# EAGLE board PCB_2.1 (EAGLE 8.6.3)
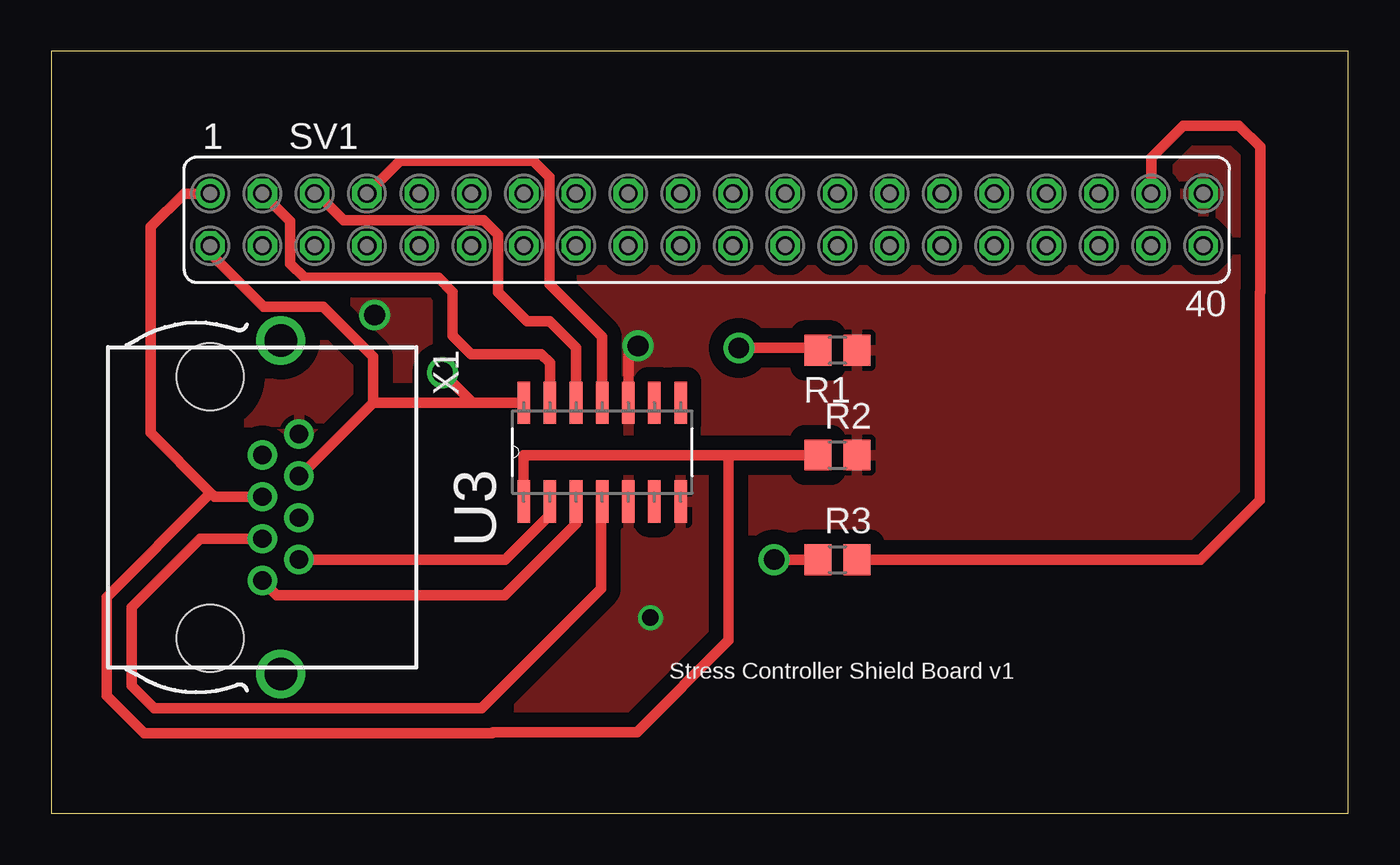
[diagram p0: board, top side]
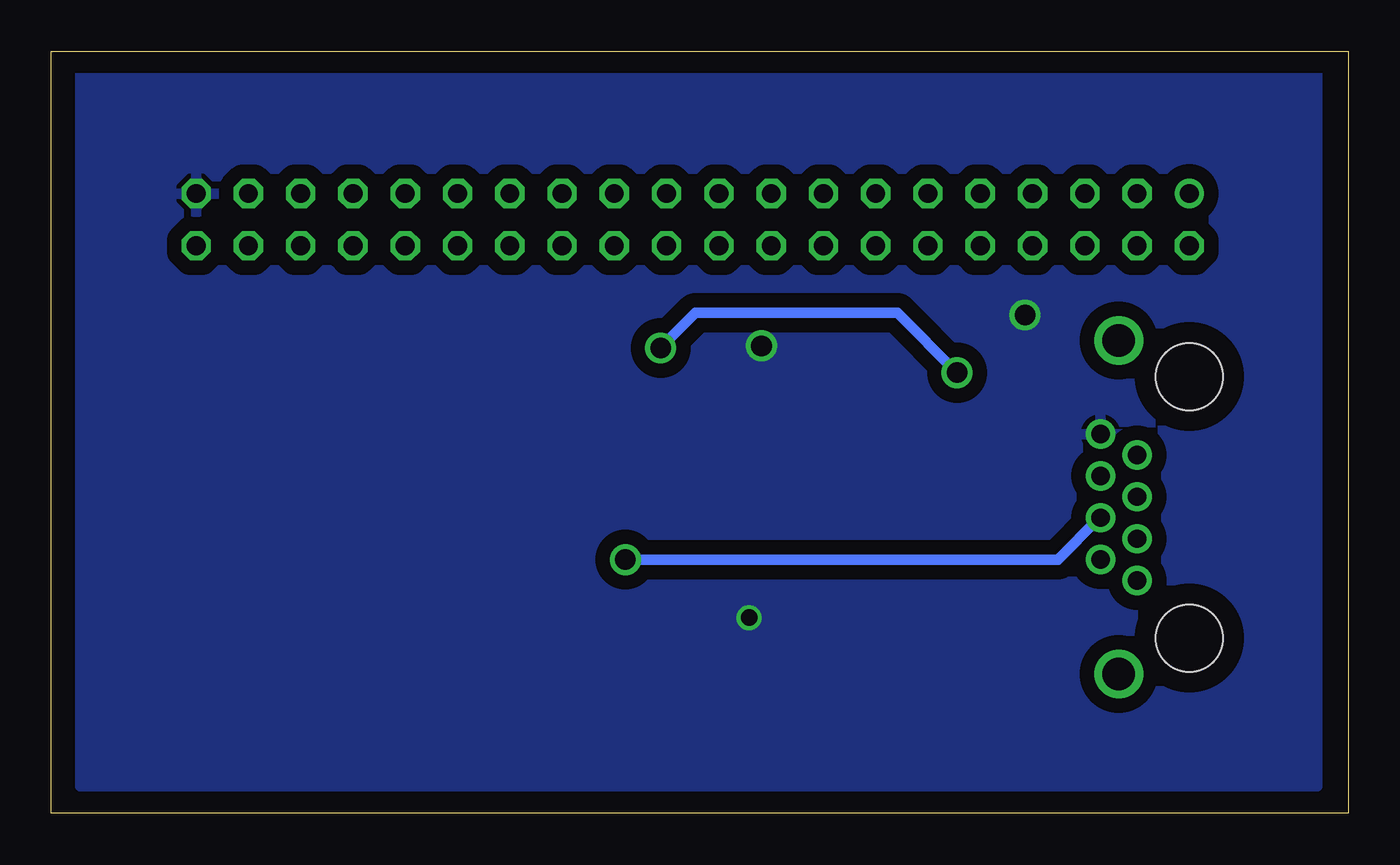
[diagram p1: board, bottom side, seen from below]

Size 63 x 37 mm. Coordinates in mm from the lower left corner, seen from the top.
Outline: 0,0 63,0 63,37 0,37 0,0
Copper layers (1*16): Top 0.035mm / dielectric 1.5mm / Bottom 0.035mm
Design rules "default *": minimum track width 6mil, minimum drill 0.35mm, track to track 0.7mm, track to pad 6mil, pad to pad 6mil, via to via 6mil, smd to smd 6mil, copper to edge 40mil, drill to drill 6mil, minimum pad ring 10mil, minimum via ring 8mil, stop-mask expansion 4mil, vias tented up to drill 0mil, thermal gap 10mil

## Footprints (pad centres in the part's own frame; a part is rotated, then mirrored left to right if it is on the bottom)
R0805 = smd 1.3 x 1.5: 1 -0.95,0; 2 0.95,0
FE20-2 = drill 0.914: 1 -24.13,1.27 | drill 0.914 octagon: 2 -24.13,-1.27; 3 -21.59,1.27; 4 -21.59,-1.27; 5 -19.05,1.27; 6 -19.05,-1.27; 7 -16.51,1.27; 8 -16.51,-1.27; 9 -13.97,1.27; 10 -13.97,-1.27; 11 -11.43,1.27; 12 -11.43,-1.27; 13 -8.89,1.27; 14 -8.89,-1.27; 15 -6.35,1.27; 16 -6.35,-1.27; 17 -3.81,1.27; 18 -3.81,-1.27; 19 -1.27,1.27; 20 -1.27,-1.27; 21 1.27,1.27; 22 1.27,-1.27; 23 3.81,1.27; 24 3.81,-1.27; 25 6.35,1.27; 26 6.35,-1.27; 27 8.89,1.27; 28 8.89,-1.27; 29 11.43,1.27; 30 11.43,-1.27; 31 13.97,1.27; 32 13.97,-1.27; 33 16.51,1.27; 34 16.51,-1.27; 35 19.05,1.27; 36 19.05,-1.27; 37 21.59,1.27; 38 21.59,-1.27; 39 24.13,1.27; 40 24.13,-1.27
SOIC127P600X175-14N = smd 2.057 x 0.61: 1 -4.801,7.62; 2 -4.801,6.35; 3 -4.801,5.08; 4 -4.801,3.81; 5 -4.801,2.54; 6 -4.801,1.27; 7 -4.801,0; 8 0,0; 9 0,1.27; 10 0,2.54; 11 0,3.81; 12 0,5.08; 13 0,6.35; 14 0,7.62
0446200002 = drill 0.889 pad 1.422: 1 3.556,2.54; 2 2.54,4.318; 3 1.524,2.54; 4 0.508,4.318; 5 -0.508,2.54; 6 -1.524,4.318; 7 -2.54,2.54; 8 -3.556,4.318 | drill 1.575 pad 2.286: S@1 -8.103,3.429; S@2 8.103,3.429 | hole 3.251: 6.35,0; -6.35,0

## Placement (x,y rotation side)
R1  [R0805]  38.19,22.48 180 top
R2  [R0805]  38.19,17.4 0 top
R3  [R0805]  38.19,12.32 0 top
SV1  [FE20-2]  31.84,28.83 0 top
U3  TXS0104ED  [SOIC127P600X175-14N]  30.57,19.94 90 top
X1  0446200002  [0446200002]  7.71,14.86 270 top

## Library data of the parts
R1-R3 = resistor
SV1 = con-lsta; OC_FARNELL: unknown; OC_NEWARK: unknown
U3 = TXS0104ED; AVAILABILITY: Unavailable; DESCRIPTION: 4-Bit Bidirectional Voltage-Level Shifter for Open-Drain and Push-Pull Applications 14-SOIC -40 to 85; MF: Texas Instruments; MP: TXS0104ED; PACKAGE: SOIC-14 Texas Instruments; PRICE: None
X1 = 0446200002; AVAILABILITY: Unavailable; DESCRIPTION: Conn RJ-45 RCP 8 POS 2.04mm Solder RA Thru-Hole 8 Terminal 1 Port Tray Cat 3; MF: Molex, LLC; MP: 0446200002; PACKAGE: None; PRICE: None

## Nets
A1: U3.2 X1.2
A2: U3.3 X1.1
A3: U3.4 X1.3
BUZZER: SV1.40
GND: R1.1 R2.2 SV1.39 U3.5 U3.7 U3.10 X1.8
INT: SV1.7 U3.11
LED: R3.1 X1.4
N$1: R3.2 SV1.37
OE: U3.8
SCL: SV1.5 U3.12
SDA: SV1.3 U3.13
VCCA: R2.1 SV1.1 U3.1 X1.5
VCCB: R1.2 SV1.2 U3.14 X1.6

## Tracks (layer width: path | path; a pad name or v marks a point on that pad's centre or on a via)
A1
  Top 0.508: U3.2 24.18,15.1 24.18,14.46 22.04,12.32 X1.2
A2
  Top 0.508: X1.1 10.95,10.6 22.03,10.6 25.49,14.06 U3.3
A3
  Top 0.152: 26.7,15.08 U3.4
  Top 0.508: 26.7,15.08 26.7,10.9 20.9,5.1 5,5.1 3.9,6.2 3.9,10 7.24,13.34 X1.3
GND  (via drill 0.8, 1)
  Top 0.203: 28,21.7 28.03,21.7
  Top 0.508: U3.10 28.03,21.7 28.03,22.23 v28.5,22.7
  other vias: 15.7,24.2 29.1,9.5
  pour Top: 1.5,36 1.5,1.3 61.6,1.3 61.6,36
  pour Bottom: 1.5,36 1.5,1.3 61.6,1.3 61.6,36
INT
  Top 0.508: SV1.7 16.93,31.7 23.4,31.7 24.2,30.9 24.2,25.7 25.4,24.5 26.76,23.14 U3.11
LED  (via drill 1)
  Top 0.508: R3.1 v35.11,12.32
  Bottom 0.152: 12.13,14.3 X1.4
  Bottom 0.508: 12.13,14.3 14.11,12.32 v35.11,12.32
N$1
  Top 0.508: SV1.37 53.43,31.83 55,33.4 57.7,33.4 58.73,32.37 58.73,25.3 58.7,25.27 58.7,15.2 55.82,12.32 R3.2
SCL
  Top 0.152: 12.89,30.15 12.88,30.14 | 12.88,30.14 SV1.5 | 12.88,30.12 12.88,30.14
  Top 0.508: U3.12 25.49,22.61 24.2,23.9 23.1,23.9 21.7,25.3 21.7,28.1 21,28.8 14.2,28.8 12.88,30.12
SDA
  Top 0.508: U3.13 24.22,21.88 23.8,22.3 20.4,22.3 19.5,23.2 19.5,25.3 18.8,26 12.3,26 11.6,26.7 11.6,28.75 SV1.3
VCCA
  Top 0.152: 22.95,15.22 U3.1
  Top 0.508: SV1.1 6.44,30.1 4.81,28.47 4.81,18.49 7.65,15.65 | X1.5 7.93,15.37 7.65,15.65 | R2.1 33,17.4 | 33,17.4 22.95,17.4 22.95,15.32 22.94,15.31 22.95,15.26 U3.1 | 33,17.4 32.9,17.3 32.9,8.4 28.44,3.94 21.45,3.94 21.4,3.89 4.5,3.89 2.69,5.7 2.69,10.5 7.65,15.46 7.65,15.65
VCCB  (via drill 1)
  Top 0.152: 12.13,16.44 X1.6 | 37.12,22.6 R1.2
  Top 0.508: 15.63,19.94 U3.14 20.46,19.94 v19,21.4 | 12.13,16.44 15.63,19.94 | 15.63,19.94 15.63,21.8 15.63,22.11 15.63,22.16 13.2,24.6 10.3,24.6 7.71,27.19 SV1.2 | v33.4,22.6 37.12,22.6
  Bottom 0.508: v19,21.4 21.9,24.3 31.7,24.3 v33.4,22.6

## Text on the board
tPlace: Stress Controller Shield Board v1